# EAGLE board relay1 (EAGLE 5.06)
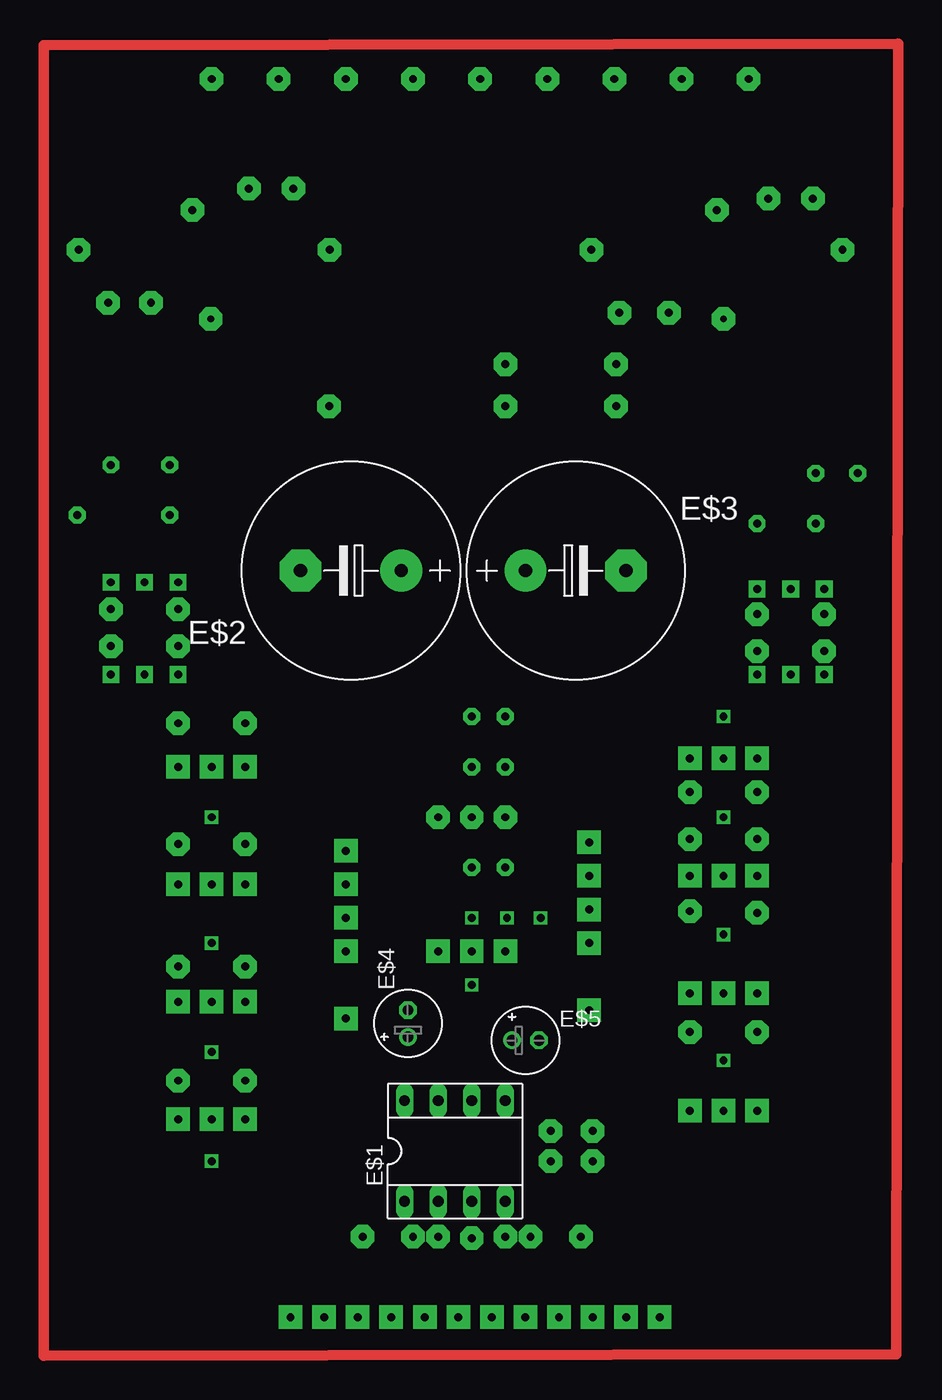
[diagram p0: board, top side]
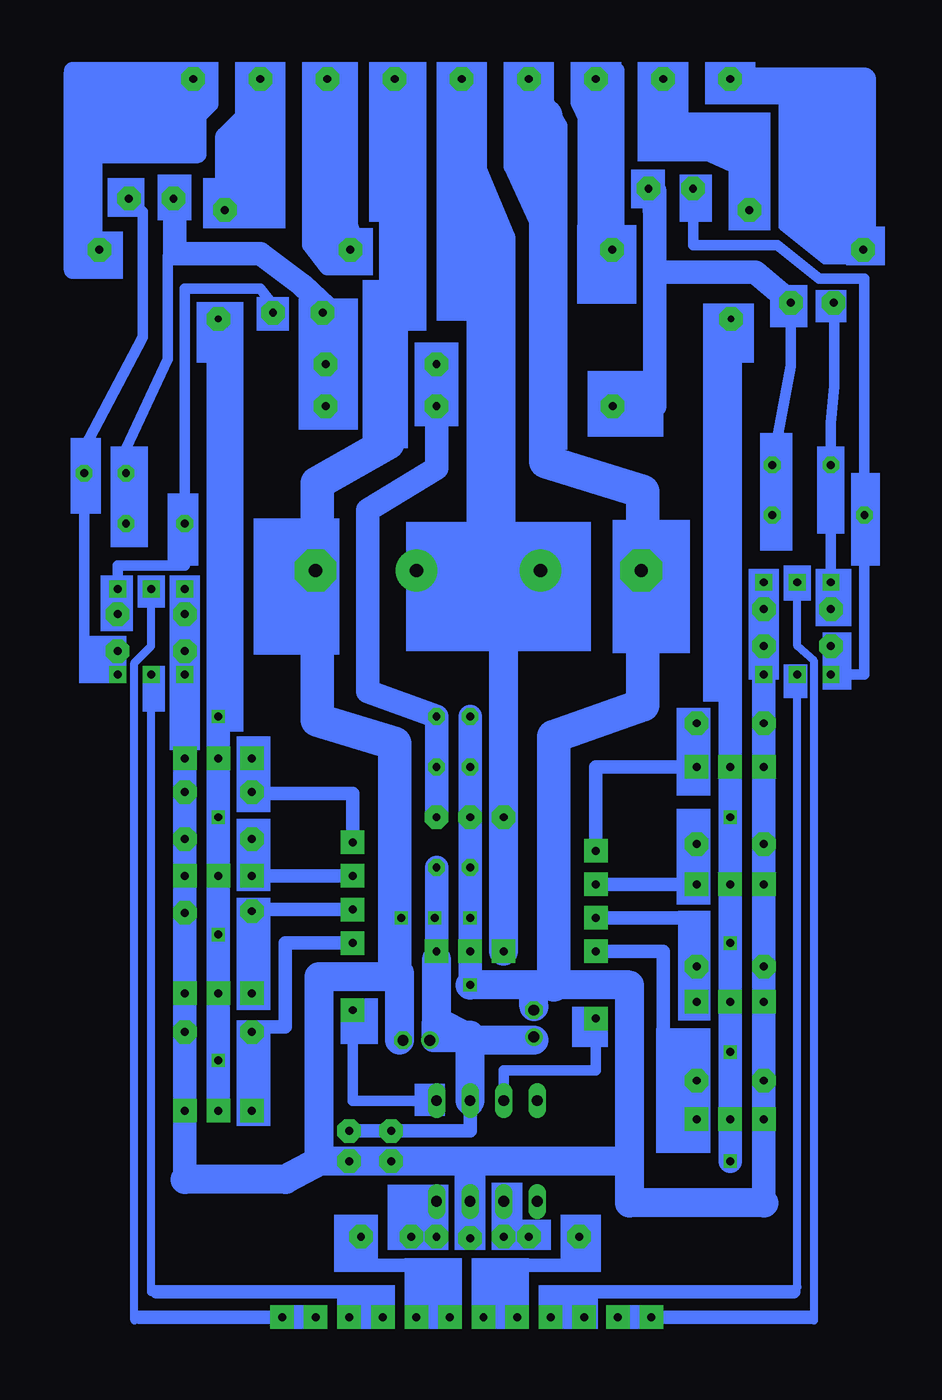
[diagram p1: board, bottom side, seen from below]

No outline drawn. Coordinates in mm, seen from the top.
Copper layers (1*16): Top 0.035mm / dielectric 1.5mm / Bottom 0.035mm
Design rules "default": minimum track width 10mil, minimum drill 24mil, track to track 8mil, track to pad 8mil, pad to pad 8mil, via to via 8mil, smd to smd 8mil, copper to edge 40mil, drill to drill 8mil, minimum pad ring 10mil, minimum via ring 8mil, stop-mask expansion 4mil, vias tented up to drill 0mil, thermal gap 10mil

## Footprints (pad centres in the part's own frame; a part is rotated, then mirrored left to right if it is on the bottom)
SOCKET-08 = drill 0.813 long: 1 -3.81,-3.81; 2 -1.27,-3.81; 3 1.27,-3.81; 4 3.81,-3.81; 5 3.81,3.81; 6 1.27,3.81; 7 -1.27,3.81; 8 -3.81,3.81
E7,5-16 = drill 1.016 pad 3.15 round: + -3.81,0 | drill 1.016 pad 3.15 octagon: - 3.81,0
E2-5 = drill 0.813 pad 1.27 round: + -1.016,0 | drill 0.813 pad 1.27 octagon: - 1.016,0

## Placement (x,y rotation side)
E$1  4427  [SOCKET-08]  31.5,13.21 0 top
E$2  [E7,5-16]  23.62,57.15 180 top
E$3  [E7,5-16]  40.64,57.15 0 top
E$4  [E2-5]  27.94,22.86 90 top
E$5  [E2-5]  36.83,21.59 0 top

## Library data of the parts
E$1 = ic-package
E$2-E$5 = rcl

## Nets
4427: E$1.3
S$16: E$1.7
S$28: E$1.5
S$53: E$1.6
S$62: E$1.4
S$86: E$1.2

## Tracks (layer width: path | path; a pad name or v marks a point on that pad's centre or on a via)
4427  (via drill 0.6, 0.6 pad 1.27, 0.6 pad 1.78)
  Bottom 0.813: v10.54,49.28 v10.54,51.44 v10.54,54.23 v10.54,56.26 | v54.36,42.93 v54.36,51.05 v54.36,53.85 v54.36,55.75
  Bottom 1.016: E$1.3 v32.77,6.6
  Bottom 1.778: v54.36,42.93 v54.36,40.39 v54.36,36.83 v54.36,31.24 v54.36,22.23 v54.36,16.26 54.36,11.05 | v32.77,25.78 v32.77,28.32 v32.77,30.86 v32.77,34.67 v32.77,38.48 v32.77,42.29 v32.77,46.1 | 32.77,12.45 E$1.3 | v10.54,49.28 v10.54,45.59 v10.54,42.29 v10.54,36.45 v10.54,27.18 v10.54,18.54 v10.54,15.62 10.54,9.27
  Bottom 2.184: 38.48,26.42 44.2,26.42 44.2,12.45 | 44.2,12.45 46.74,11.05 54.36,11.05 | v32.77,25.78 26.42,25.78 20.7,25.78 20.7,12.45 | 44.2,12.45 32.77,12.45 20.7,12.45 | 20.7,12.45 20.7,9.27 10.54,9.27 | 27.05,91.57 v28.32,94.36
  Bottom 2.54: 38.48,26.42 38.48,43.94 | 26.42,25.78 26.42,44.58 19.68,46.99 19.68,63.12 27.05,65.41 27.05,91.57
S$1  (via drill 0.6 pad 1.78)
  other vias: 3.02,81.44
S$2  (via drill 0.6, 0.6 pad 1.78)
  Bottom 1.778: v13.08,42.29 13.08,44.2 | v13.08,42.29 v13.08,38.48 v13.08,28.96 v13.08,20.7 v13.08,15.62 13.08,12.45 | v13.08,42.29 13.08,75.95
S$3  (via drill 0.6 pad 1.78)
  Bottom 0.813: v15.62,15.62 v15.62,18.54 15.62,21.97
  Bottom 1.016: 15.62,21.97 18.16,21.97 18.16,28.32 v23.24,28.32
S$4  (via drill 0.6 pad 1.27)
  Bottom 0.61: 8,2.92 v8,49.28
S$5  (via drill 0.6 pad 1.78)
  other vias: 13.08,24.51
S$6  (via drill 0.6 pad 1.78)
  Bottom 0.813: v15.62,24.51 v15.62,27.18
  Bottom 1.016: v15.62,27.18 15.62,30.86 v23.24,30.86
S$7  (via drill 0.6 pad 1.27)
  Bottom 0.813: v9.91,61.34 v9.91,65.15 8.51,72.64 8.51,77.34
S$8  (via drill 0.6 pad 1.78)
  other vias: 13.08,33.4
S$9  (via drill 0.5 pad 1.78)
  other vias: 13.02,76.19
S$10  (via drill 0.6 pad 1.78)
  Bottom 1.778: 18.8,85.85 18.8,69.6 v21.97,69.6
S$11  (via drill 0.6 pad 1.78)
  other vias: 15.9,86.07
S$12  (via drill 0.6 pad 1.78)
  Bottom 0.813: v15.62,42.29 v15.62,45.59
  Bottom 1.016: v15.62,42.29 23.24,42.29 v23.24,35.94
S$13  (via drill 0.6 pad 1.78)
  other vias: 22.02,81.44
S$14  (via drill 0.6 pad 1.78)
  other vias: 10.54,24.51
S$15  (via drill 0.6 pad 1.27, 0.6 pad 1.78)
  Bottom 0.813: v58.8,60.71 v58.8,64.52 58.8,66.42 55.63,73.15 55.63,80.9 54.99,85.34 55.12,81.15
  Bottom 1.778: 55.12,85.6 55.12,81.15 48.64,81.15 45.47,78.74 43.69,77.09 v43.69,72.77
S$16  (via drill 0.6 pad 1.78)
  Bottom 0.813: v23.24,23.24 23.24,19.3 30.23,19.3 E$1.7
S$17  (via drill 0.6 pad 1.78)
  other vias: 51.82,25.15
S$18
  Top 0.813: 0.38,96.9 65.02,97.03 64.9,-2.16 0.38,-2.29 0.38,96.9
S$19  (via drill 0.6 pad 1.78)
  Bottom 1.016: v41.66,34.04 v49.28,34.04
S$20  (via drill 0.6 pad 1.78)
  other vias: 51.82,34.04
S$21  (via drill 0.6 pad 1.78)
  other vias: 19.27,86.07
S$22  (via drill 0.6 pad 1.78)
  Bottom 0.813: 49.28,40.26 v49.28,42.93
  Bottom 1.016: 49.28,40.26 41.66,40.26 v41.66,36.58
S$23  (via drill 0.6 pad 1.78)
  Bottom 1.778: v43.69,69.6 43.69,73.15
S$24  (via drill 0.6 pad 1.78)
  other vias: 8.49,77.43
S$25  (via drill 0.6 pad 1.78)
  other vias: 10.54,33.4
S$26  (via drill 0.6 pad 1.78)
  other vias: 11.63,84.44
S$27  (via drill 0.5 pad 1.78)
  other vias: 51.82,76.19
S$28  (via drill 0.6 pad 1.78)
  Bottom 0.813: E$1.5 41.66,17.02 v41.66,23.88
S$29  (via drill 0.6)
  other vias: 51.82,46.1
S$30  (via drill 0.6 pad 1.78)
  other vias: 54.36,25.15
S$31  (via drill 0.6 pad 1.78)
  Bottom 0.813: 49.28,22.61 v49.28,22.23 v49.28,16.26
  Bottom 1.016: v41.66,28.96 46.74,28.96 46.74,22.61 49.28,22.61
S$32  (via drill 0.6 pad 1.27)
  Bottom 0.813: v5.46,49.28 2.92,49.28 v2.92,61.34 2.92,79.25 6.35,79.25 9.53,81.79 15.88,81.79 15.88,85.98
  Bottom 1.016: v5.46,49.28 5.46,51.31
S$33  (via drill 0.6)
  other vias: 13.08,12.45
S$34  (via drill 0.6 pad 1.78)
  Bottom 1.778: 21.97,81.66 21.97,89.28 23.24,91.82 v23.24,94.36
S$35  (via drill 0.6 pad 1.78)
  other vias: 5.25,77.43
S$36  (via drill 0.6 pad 1.78)
  other vias: 60.82,81.44
S$37  (via drill 0.6 pad 1.78)
  Bottom 1.016: 34.67,4.57 41.02,4.57 v41.02,6.73
S$38  (via drill 0.6 pad 1.78)
  other vias: 55.21,85.31
S$39  (via drill 0.6)
  other vias: 35.43,30.86
S$40  (via drill 0.6 pad 1.78)
  other vias: 58.58,85.31
S$41  (via drill 0.6 pad 1.78)
  other vias: 41.82,81.44
S$42  (via drill 0.6 pad 1.78)
  other vias: 51.32,84.44
S$43  (via drill 0.6 pad 1.78)
  other vias: 47.68,76.67
S$44  (via drill 0.6 pad 1.78)
  other vias: 43.93,76.67
S$45  (via drill 0.6 pad 1.27)
  Bottom 0.61: v8,56.26 8,51.44 6.73,50.29 6.73,0.38
S$46  (via drill 0.6 pad 1.78)
  Bottom 0.813: v15.62,33.4 v15.62,36.45 15.62,36.7
  Bottom 1.016: v15.62,33.4 v23.24,33.4
S$47  (via drill 0.6 pad 1.78)
  Bottom 1.778: 2.92,81.66 2.92,94.36 v13.08,94.36
S$48
  Bottom 1.778: 30.1,57.02 29.97,57.02 30.1,57.28 36.83,57.28
S$49  (via drill 0.6 pad 1.78)
  other vias: 54.36,34.04
S$50  (via drill 0.6 pad 1.78)
  Bottom 0.813: 49.28,31.5 v49.28,31.37 v49.28,25.15
  Bottom 1.016: 49.28,31.5 v41.66,31.5
S$51  (via drill 0.6 pad 1.78)
  Bottom 1.778: 11.68,84.45 11.68,87.63 18.16,90.55 v18.16,94.36
S$52
  Bottom 0.813: 18.8,79.76 19.43,85.47
  Bottom 1.778: 8.51,77.47 11.18,79.76 18.8,79.76
S$53  (via drill 0.6 pad 1.27, 0.6 pad 1.78)
  Bottom 1.016: E$1.6 32.77,14.73 42.29,14.73
  Bottom 1.778: v35.31,28.32 35.31,27.69 v35.31,34.67 | 32.77,21.97 35.31,23.24
  Bottom 2.184: 35.31,23.24 35.31,27.69 | E$1.6 32.77,21.97
S$54  (via drill 0.6 pad 1.78)
  Bottom 1.778: 51.18,84.2 51.18,89.92 48.64,92.46 v48.64,94.36
S$55  (via drill 0.6 pad 1.78)
  other vias: 41.91,14.73
S$56  (via drill 0.6 pad 1.78)
  Bottom 1.778: 61.98,81.66 61.98,93.73 53.72,93.73 v53.72,94.36
S$57  (via drill 0.6 pad 1.78)
  Bottom 1.778: 41.66,81.66 43.56,88.01 v43.56,94.36
S$58  (via drill 0.6, 0.6 pad 1.78)
  Bottom 1.778: v51.82,16.26 v51.82,20.07 v51.82,29.59 v51.82,38.48 v51.82,42.93 51.82,75.95
S$59  (via drill 0.6 pad 1.78)
  Bottom 1.778: v33.4,94.36 33.4,89.92 30.23,82.3 30.23,57.15 27.3,57.28
  Bottom 2.184: v30.23,28.32 v30.23,38.48 30.23,57.15
S$60  (via drill 0.6 pad 1.27, 0.6 pad 1.78)
  Bottom 1.778: v35.31,72.77 v35.31,69.6 35.31,64.9 40.51,61.72 40.51,48.01 v35.31,46.1 v35.31,42.29 v35.31,38.48
S$61  (via drill 0.6 pad 1.27)
  Bottom 0.61: 56.9,2.54 v56.9,49.28
S$62  (via drill 0.6 pad 1.78)
  Bottom 0.813: v35.31,6.73 E$1.4
  Bottom 1.016: v35.31,6.73 v37.21,6.73
S$63  (via drill 0.6 pad 1.27, 0.6 pad 1.78)
  Bottom 0.813: v59.44,55.75 59.44,57.53 54.36,57.53 v54.36,60.71 54.36,78.49 48.64,78.49
  Bottom 1.016: v59.44,55.75 v59.44,53.85
S$64  (via drill 0.6)
  other vias: 37.97,30.86
S$65  (via drill 0.6 pad 1.27)
  Bottom 0.61: v56.9,55.75 56.9,51.44 58.17,50.16 58.17,0.38
S$66  (via drill 0.6 pad 1.27)
  other vias: 54.36,49.28
S$67  (via drill 0.6 pad 1.78)
  other vias: 49.28,40.39
S$68  (via drill 0.6 pad 1.78)
  Bottom 0.813: 49.28,33.91 v49.28,36.83
S$69  (via drill 0.6 pad 1.78)
  Bottom 2.184: 38.99,66.8 38.99,76.07 37.85,77.47 37.85,92.58 v38.48,94.36
  Bottom 2.54: 38.48,44.07 44.32,45.85 44.32,63.75 38.99,66.8
S$70
  Bottom 0.813: 18.54,85.98 19.18,86.11
S$71
  Bottom 0.813: 47.24,76.71 48.64,78.49
S$72
  Bottom 1.778: 33.02,21.59 35.56,21.59 35.56,22.86
S$73
  Bottom 2.184: 38.1,21.59 38.1,26.67
S$74
  Bottom 2.184: 27.94,24.13 27.94,25.4
S$75
  Bottom 2.184: 27.94,21.59 32.38,21.59
S$76
  Bottom 1.016: 32.38,16.51 33.02,16.51
S$77  (via drill 0.6 pad 1.78)
  other vias: 41.91,12.45
S$78  (via drill 0.6 pad 1.78)
  other vias: 38.73,14.73
S$79  (via drill 0.6 pad 1.78)
  other vias: 38.73,12.45
S$80  (via drill 0.6 pad 1.27, 0.6 pad 1.78)
  Bottom 0.813: 5.21,77.34 5.21,71.12 5.46,68.33 v5.46,65.15 5.46,60.71 | v5.46,56.26 5.46,60.71 | 5.46,60.71 5.46,61.34
  Bottom 1.016: v5.46,54.23 v5.46,56.26
S$81  (via drill 0.6 pad 1.78)
  other vias: 5.46,51.44
S$82  (via drill 0.6 pad 1.78)
  other vias: 59.44,51.05
S$83
  Bottom 0.406: 3.94,80.52 5.97,80.52 9.14,83.06 6.1,83.06 6.1,80.9 8.38,82.8 6.22,82.68 6.35,81.41 7.62,82.55 6.48,82.55 6.48,81.92 7.11,82.42 6.6,82.42 6.35,82.3
S$84  (via drill 0.6 pad 1.27)
  Bottom 0.813: v59.44,49.28 61.98,49.28 v61.98,64.52 61.98,66.42 57.53,74.8 57.53,84.33 58.55,85.34
  Bottom 1.016: v59.44,49.28 59.44,50.93
S$85  (via drill 0.6 pad 1.78)
  Bottom 1.016: v24.51,6.73 24.51,4.57 28.96,4.57
S$86  (via drill 0.6 pad 1.78)
  Bottom 0.813: v30.23,6.73 E$1.2
  Bottom 1.016: v30.23,6.73 v28.32,6.73
S$87  (via drill 0.6 pad 1.78)
  Bottom 1.016: 8.26,2.54 24.13,2.54 v24.13,0.64 v26.67,0.64
S$88
  Bottom 1.27: 61.85,87.63 61.85,88.65 53.34,88.65 53.34,93.09 60.71,93.09 60.71,89.15 54.1,89.53 54.1,92.33 59.94,92.33 59.82,89.92 55.37,90.3 54.61,90.93 54.86,91.44 59.44,91.31 59.56,90.81 53.85,91.19 54.36,91.06
S$89
  Bottom 1.27: 21.72,88.9 21.72,95
S$90
  Bottom 1.27: 43.31,80.14 44.83,81.79 43.56,80.14
S$91
  Bottom 1.27: 43.56,80.26 43.69,81.79
S$92
  Bottom 1.27: 61.21,82.3 61.21,89.92
S$93
  Bottom 1.27: 23.24,81.03 23.24,89.92 24.51,92.58 21.97,92.58
S$94
  Bottom 1.27: 24,92.2 24,80.14 22.73,80.14
S$95
  Bottom 1.27: 29.59,88.01 29.59,87.76 27.3,82.8 28.45,87.88
S$96
  Bottom 1.27: 26.04,90.3 26.04,90.81 27.05,92.58
S$97
  Bottom 1.27: 8,87.63 8,88.27
S$98
  Bottom 1.27: 62.87,79.88 62.87,93.47 | 62.87,93.47 62.87,93.98 61.72,93.98 | 62.87,93.47 62.87,94.87
S$99
  Bottom 1.27: 54.48,94.87 55.24,95 62.87,95 62.74,93.47
S$100
  Bottom 1.27: 52.45,92.46 53.59,91.31
S$103  (via drill 0.6 pad 1.78)
  Bottom 1.016: 29.21,4.45 v29.21,0.64 v31.75,0.64
S$105  (via drill 0.6 pad 1.78)
  Bottom 1.016: 34.29,4.45 v34.29,0.64 v36.83,0.64
S$107  (via drill 0.6 pad 1.78)
  Bottom 1.016: 56.52,2.54 39.37,2.54 v39.37,0.64 v41.91,0.64
S$109  (via drill 0.6 pad 1.78)
  Bottom 1.016: 57.78,0.64 v46.99,0.64 v44.45,0.64
S$110  (via drill 0.6 pad 1.78)
  Bottom 1.016: 6.99,0.64 v21.59,0.64
S$111  (via drill 0.6 pad 1.78)
  other vias: 19.05,0.64
(copper drawn outside any net)
  shapes: Bottom area x117, Bottom circle x1